# Altium PCB PCB1.PcbDoc
Units mm, origin at the board's own origin, x right, y up, seen from the top; angles counter-clockwise.
Board outline 71.95 x 78.2 mm, 2 copper layers (Top Layer, Bottom Layer); 19 components, 26 nets, 66 pads, 0 vias.
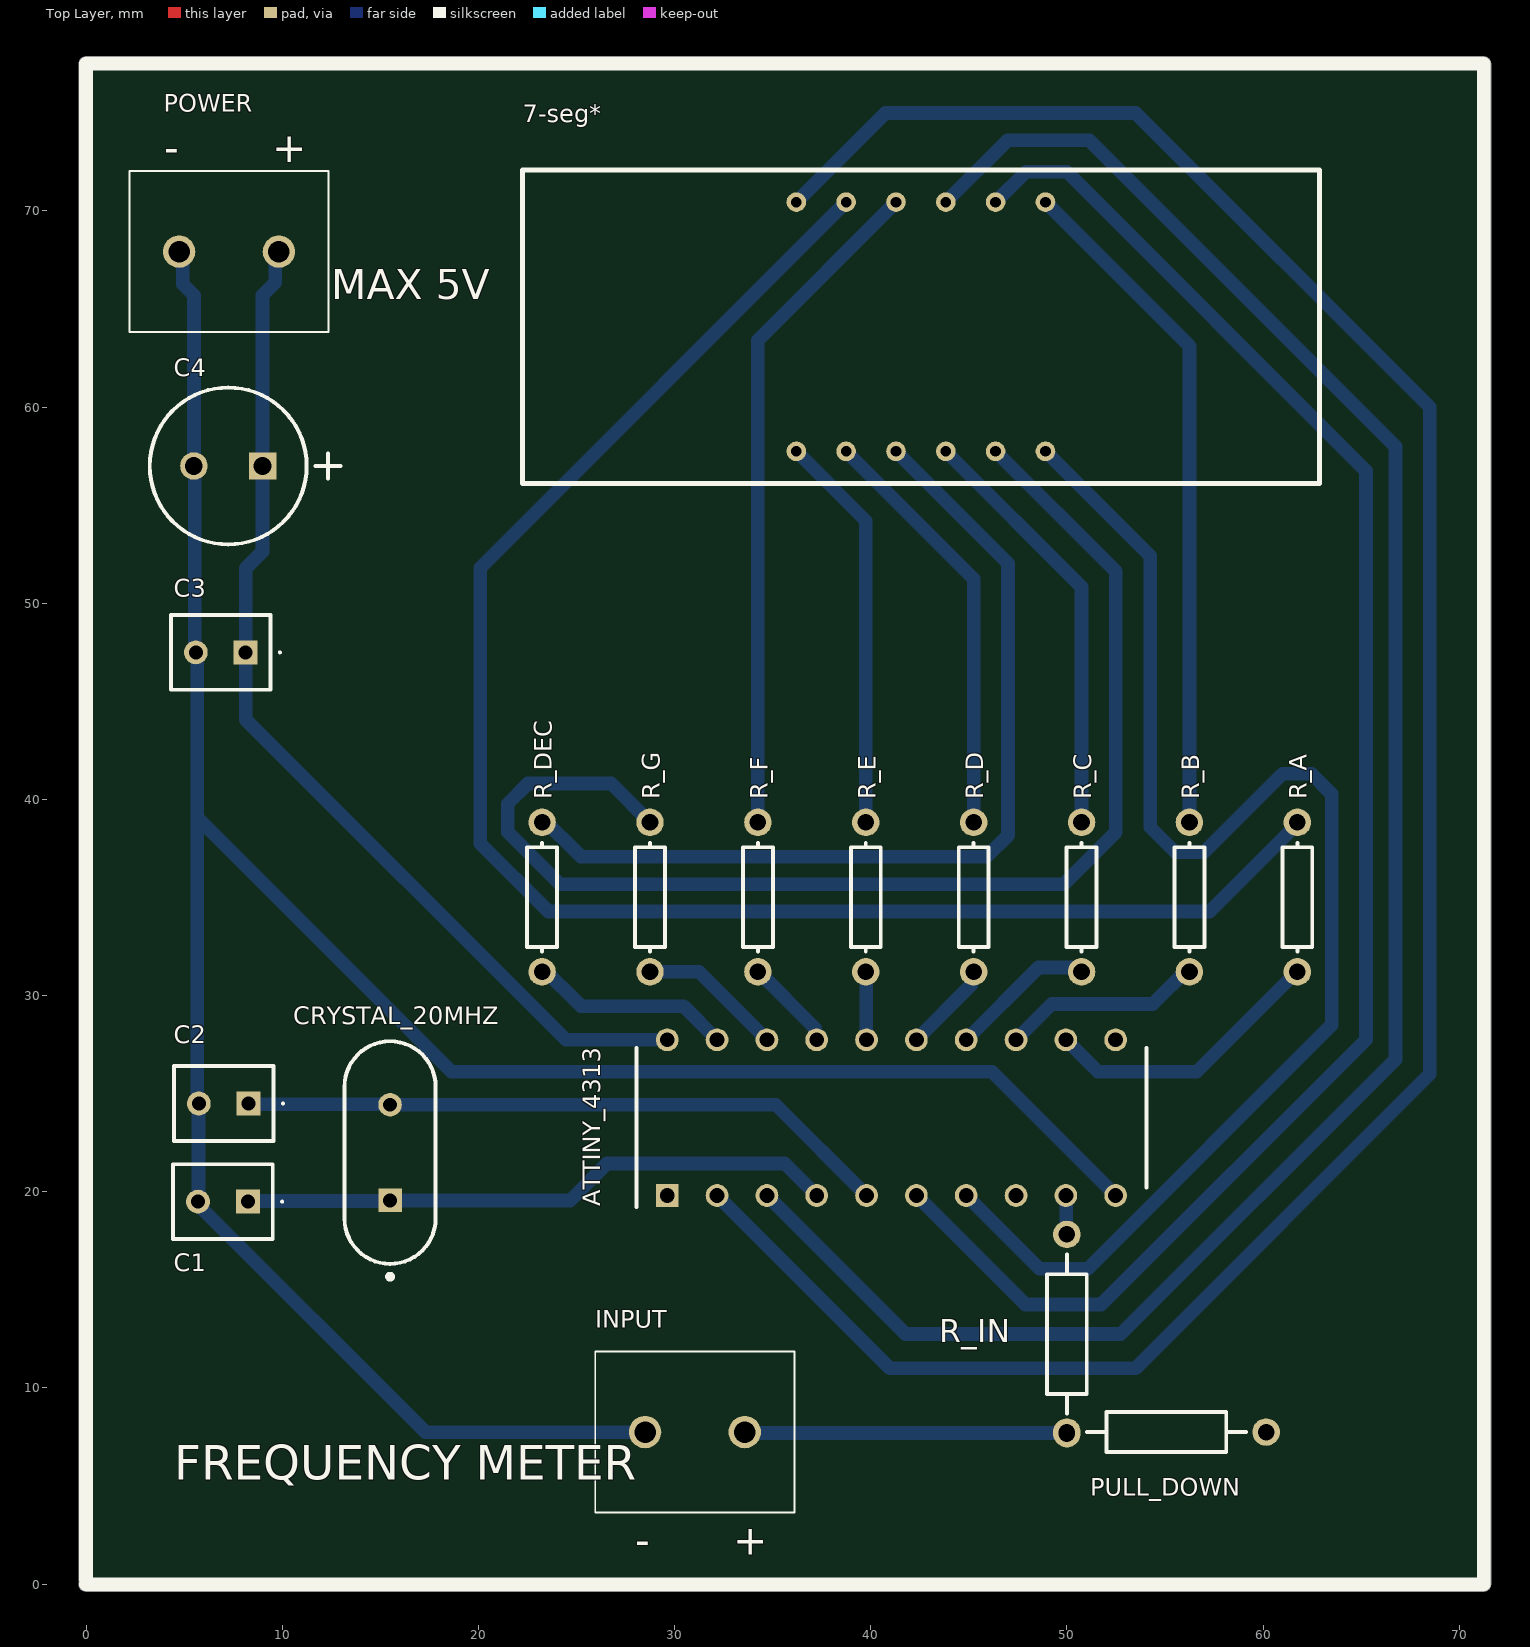
[diagram p0: Top Layer view]
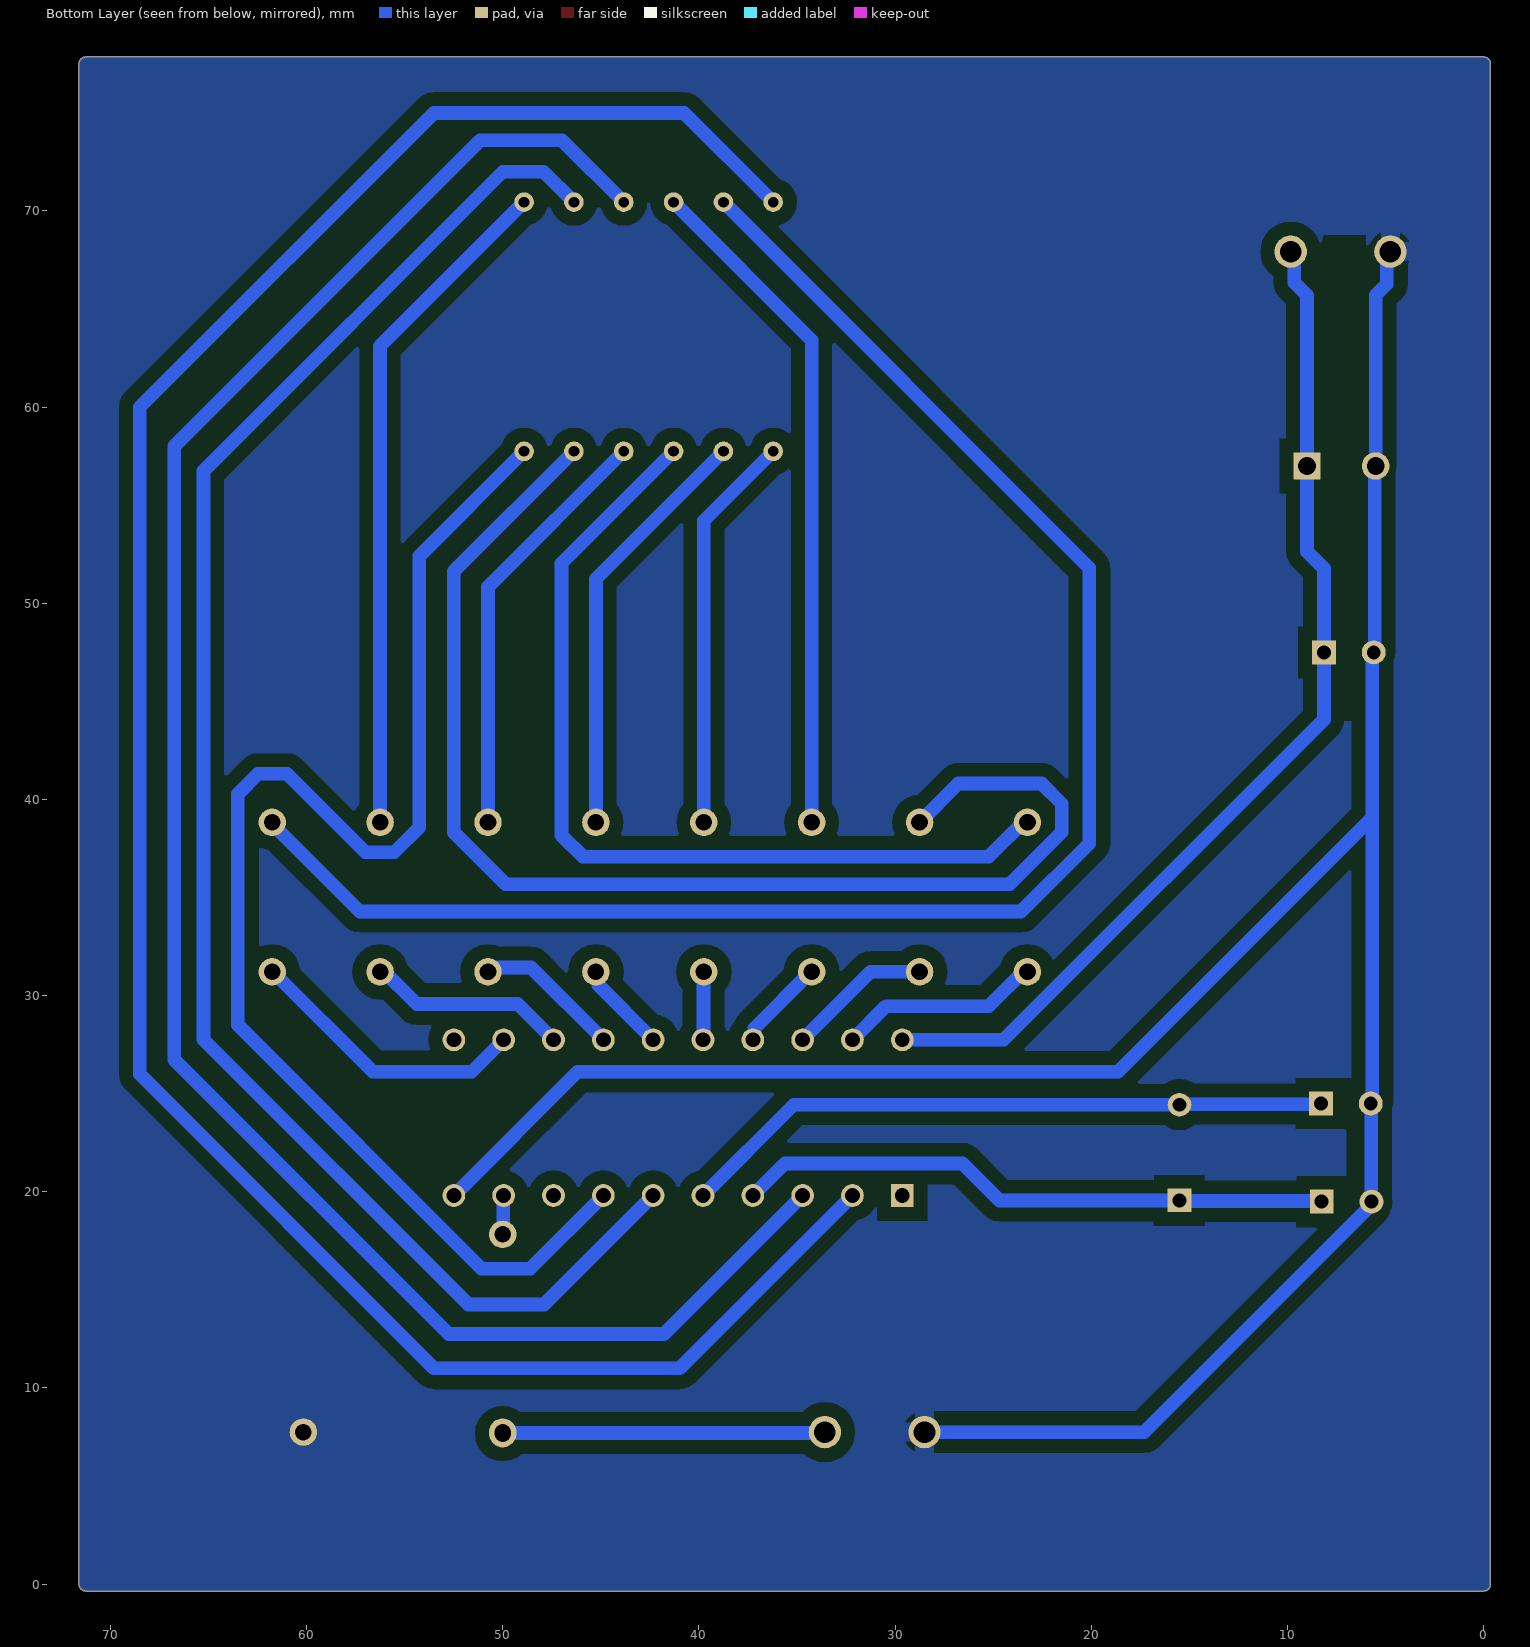
[diagram p1: Bottom Layer view, seen from below]

## Layer stack, top to bottom
Top Solder: solder mask 0.0102, Solder Resist, Dk 3.5
Top Layer: signal copper 0.0356
Dielectric 1: dielectric 0.32, FR-4, Dk 4.8
Bottom Layer: signal copper 0.0356
Bottom Solder: solder mask 0.0102, Solder Resist, Dk 3.5

## Board outline
-0.327,0.125 cw(c0,0.25) -0.35,0.25 -0.35,77.5 cw(c0,77.5) 0,77.85 71.25,77.85 cw(c71.25,77.5) 71.6,77.5 71.6,0 cw(c71.25,0) 71.25,-0.35 0,-0.35 cw(c0,0)

## Design rules (kind name [scope] priority, off if disabled: settings)
Clearance [All] p1: gap=0.7 ignorepadtopadclearanceinfootprint=TRUE
PlaneClearance [All] p1: clearance=1
PlaneConnect [All] p1: planeconnectstyle=Relief reliefexpansion=0.508 reliefentries=4 reliefconductorwidth=1 reliefairgap=0.254
PolygonConnect [All] p1: thpad.connectstyle=Relief thpad.reliefconductorwidth=1 thpad.reliefentries=4 thpad.polygonreliefangle="90 Angle" thpad.airgapwidth=0.254 smdpad.connectstyle=Relief smdpad.reliefconductorwidth=0.254 smdpad.reliefentries=4 smdpad.polygonreliefangle="90 Angle" smdpad.airgapwidth=0.254 via.connectstyle=Relief via.reliefconductorwidth=0.254 via.reliefentries=4 via.polygonreliefangle="90 Angle" via.airgapwidth=0.254
RoutingLayers [All] p1: top layer_v5=FALSE bottom layer_v5=TRUE
RoutingVias [All] p1: holewidth=0.711 width=1.27 viastyle="Through Hole" minholewidth=0.711 minwidth=1.27 maxholewidth=0.711 maxwidth=1.27
SolderMaskExpansion [All] p1: expansion=0.102 istentingtop=FALSE
Width [All] p1: maxlimit=1 minlimit=0.7 preferedwidth=0.7
27 further rules are at their usual default settings.

## Components (designator, comment, footprint, x,y, rotation, side; value= is the part's Value field where it differs from the comment)
7-seg* "7 segment 4 digit display" PCBComponent_1 42.56,64.1 r0 top
ATTINY_4313 "ATTINY4313-PU" DIP794W56P254L2574H533Q20N 41.06,23.781 r90 top
C1 "12pf" C320C104KCR5TA 8.25,19.5 r180 top
C2 "22pf" C320C104KCR5TA 8.29,24.5 r180 top
C3 "C320C104KCR5TA" C320C104KCR5TA 8.137,47.5 r180 top
C4 "ECA1HM101" CAPPR65-350-1150X800X1250 7.25,57 r180 top value=470µF
CRYSTAL_20MHZ "FOXSLF/080-20" FOX-FOXSLF080-20 15.5,22 r90 top
INPUT "282837-2" 2828372 33.58,7.75 r180 top
POWER "282837-2" 2828372 9.83,67.927 r180 top
PULL_DOWN "100k" AXIAL-0.4 55.08,7.75 r0 top value=1K
R_A "Res1" AXIAL-0.3 61.75,35.025 r270 top value=560
R_B "Res1" AXIAL-0.3 56.25,35.025 r270 top value=560
R_C "Res1" AXIAL-0.3 50.75,35.025 r270 top value=560
R_D "Res1" AXIAL-0.3 45.25,35.025 r270 top value=560
R_DEC "Res1" AXIAL-0.3 23.25,35.025 r270 top value=560
R_E "Res1" AXIAL-0.3 39.75,35.025 r270 top value=560
R_F "Res1" AXIAL-0.3 34.25,35.025 r270 top value=560
R_G "Res1" AXIAL-0.3 28.75,35.025 r270 top value=560
R_IN "270" AXIAL-0.4 50,12.75 r270 top value=1K

## Footprints (in the part's own frame and the unit in brackets; to place one, negate y for a bottom-side part, rotate by r counter-clockwise, add the part's x,y. Pads: shape width x height; smd on the part's side, far side on the other; paste and mask are expansions set on the pad)
2828372 [mm]
  round 1.65 hole 1.1: 1(0,0) 2(5.08,0)
  silkscreen extent -2.54,-4.1 7.62,4.1, body extent -2.51,-4.11 8.25,4.09, height 9.84
AXIAL-0.3 [mm] "Axial Device, Thru-Hole; 2 Leads; 0.3 in Pin Spacing"
  round 1.4 hole 0.85: 1(-3.81,0) 2(3.81,0)
  silkscreen extent -2.77,-0.76 2.77,0.76
AXIAL-0.4 [mm] "Axial Device, Thru-Hole; 2 Leads; 0.4 in Pin Spacing"
  round 1.4 hole 0.85: 1(-5.08,0) 2(5.08,0)
  silkscreen extent -4.06,-1.02 4.06,1.02
C320C104KCR5TA [mm]
  rect 1.217x1.217 hole 0.71: 1(0,0)
  round 1.217 hole 0.71: 2(2.54,0)
  silkscreen extent -1.8,-1.9 3.81,1.91, body extent -1.27,-1.91 3.81,1.91, height 7.36
CAPPR65-350-1150X800X1250 [mm] "THD, 2-Leads, Dia 8mm, Pin Spacing 3.5mm"
  rect 1.4x1.4 hole 0.9: 1(-1.75,0)
  round 1.4 hole 0.9: 2(1.75,0)
  silkscreen extent -5.71,-4 4,4, body extent -4,-4 3.95,4, height 12.5
DIP794W56P254L2574H533Q20N [mm]
  rect 1.159x1.159 hole 0.759: 1(-3.969,11.43)
  round 1.159 hole 0.759: 2(-3.969,8.89) 3(-3.969,6.35) 4(-3.969,3.81) 5(-3.969,1.27) 6(-3.969,-1.27) 7(-3.969,-3.81) 8(-3.969,-6.35) 9(-3.969,-8.89) 10(-3.969,-11.43) 11(3.969,-11.43) 12(3.969,-8.89) 13(3.969,-6.35) 14(3.969,-3.81) 15(3.969,-1.27) 16(3.969,1.27) 17(3.969,3.81) 18(3.969,6.35) 19(3.969,8.89) 20(3.969,11.43)
  silkscreen extent -4.55,-12.99 3.56,12.99, body extent -4.11,-12.87 4.11,12.87, height 5.33
FOX-FOXSLF080-20 [mm] "THD, 2-Leads, Body 11.35x4.65mm"
  rect 1.2x1.2 hole 0.7: 1(-2.44,0)
  round 1.2 hole 0.7: 2(2.44,0)
  silkscreen extent -6.45,-2.32 5.67,2.32, body extent -5.68,-2.33 5.68,2.33, height 3.6
PCBComponent_1 [mm]
  round 1 hole 0.55: 1(-6.35,-6.35) 2(-3.81,-6.35) 3(-1.27,-6.35) 4(1.27,-6.35) 5(3.81,-6.35) 6(6.35,-6.35) 7(6.35,6.35) 8(3.81,6.35) 9(1.27,6.35) 10(-1.27,6.35) 11(-3.81,6.35) 12(-6.35,6.35)
  silkscreen extent -20.32,-8 20.32,8, body extent -20.25,-7.9 20.25,7.9, height 8

## Part data
ATTINY_4313: "Integrated Circuit", Manufacturer_Name=Microchip, Mouser Part Number=556-ATTINY4313-PU, Arrow Part Number=ATTINY4313-PU, Arrow Price/Stock=https://www.arrow.com/en/products/attiny4313-pu/microchip-technology?region=nac, Datasheet Link=http://www.atmel.com/images/8246s.pdf, Height=5.334mm, Manufacturer_Part_Number=ATTINY4313-PU, Mouser Price/Stock=https://www.mouser.co.uk/ProductDetail/Microchip-Technology/ATTINY4313-PU?qs=lwdSMh1%2FoYKRSyWx6oCIeQ%3D%3D
C1 C2: library part C320C104KCR5TA, "Capacitor", Manufacturer_Name=KEMET, Mouser Part Number=80-C320C104KCR, Arrow Part Number=C320C104KCR5TA, Arrow Price/Stock=https://www.arrow.com/en/products/c320c104kcr5ta/kemet-corporation, Datasheet Link=https://content.kemet.com/datasheets/KEM_C1055_HIVOLT_GOLDMAX_300_X7R.pdf, Height=7.36mm, Manufacturer_Part_Number=C320C104KCR5TA, Mouser Price/Stock=https://www.mouser.com/Search/Refine.aspx?Keyword=80-C320C104KCR
C3: "Capacitor", Manufacturer_Name=KEMET, Mouser Part Number=80-C320C104KCR, Arrow Part Number=C320C104KCR5TA, Arrow Price/Stock=https://www.arrow.com/en/products/c320c104kcr5ta/kemet-corporation, Datasheet Link=https://content.kemet.com/datasheets/KEM_C1055_HIVOLT_GOLDMAX_300_X7R.pdf, Height=7.36mm, Manufacturer_Part_Number=C320C104KCR5TA, Mouser Price/Stock=https://www.mouser.com/Search/Refine.aspx?Keyword=80-C320C104KCR
C4: library part CMP-001-00026-7, "Aluminum Electrolytic Capacitor, 100 uF, +/- 20%, 50 V, -40 to 85 degC, 2-Pin THD, RoHS, Bulk", Capacitor Type=Electrolytic, Case/Package=Radial, Manufacturer=Panasonic, Max Operating Temperature=85°C, Min Operating Temperature=-40°C, Package Description="2-Pin Radial Lead, Dia 8 mm, Height 12.5 mm", Package Quantity=200, Package Reference=CAPPR65-350-1150X800X1250, Ripple Current=250mA, Tolerance=20%, Voltage Rating=50V, Datasheet URL=https://industrial.panasonic.com/cdbs/www-data/pdf/RDF0000/ABA0000C1218.pdf, Datasheet Version="Rev. 05, 10/2016", Diameter=8mm, Lead Pitch=3.5mm, Manufacturer URL=http://www.panasonic.com/, Mounting Technology=TH, Packaging=Bulk, Pins=2, Ripple Current (AC)=250mA, RoHS Compliant=True
CRYSTAL_20MHZ: library part CMP-003-00025-2, "Resistance Weld Thru-Hole Crystal, 8 MHz, +/- 50 ppm, 10 pF, -20 to 70 degC, 2-Pin THD, RoHS, Bulk", Case/Package=FOXSLF080-20, Frequency=8MHz, Frequency Tolerance=30ppm, Load Capacitance=20pF, Manufacturer="FOX Electronics", Max Operating Temperature=70°C, Min Operating Temperature=-20°C, Package Description="2-Pin Through Hole Device, Body 11.35 x 4.65 mm", Package Quantity=100, Resistance=80Ohm, Tolerance=50ppm, Datasheet URL=http://download.siliconexpert.com/pdfs/2015/4/5/6/5/7/200/fox_/manual/35607121449963728hc49slf.pdf, Datasheet Version=Mar-15, ESR=80, Manufacturer URL=http://www.foxonline.com/, Mounting Technology=TH, Package Reference=FOXSLF080-20, Packaging=Bulk, Pins=2, RoHS Compliant=True
INPUT POWER: "Connector", Manufacturer_Name="TE Connectivity", Mouser Part Number=571-2828372, Arrow Part Number=282837-2, Arrow Price/Stock=https://www.arrow.com/en/products/282837-2/te-connectivity?region=europe, Datasheet Link=https://www.te.com/commerce/DocumentDelivery/DDEController?Action=srchrtrv&DocNm=282837&DocType=Customer+Drawing&DocLang=English&DocFormat=pdf&PartCntxt=282837-2, Height=10.3mm, Manufacturer_Part_Number=282837-2, Mouser Price/Stock=https://www.mouser.co.uk/ProductDetail/TE-Connectivity/282837-2?qs=A%252Bip%252BNCYi6O2H0NGWOeAxg%3D%3D
PULL_DOWN R_IN: library part Res2, "Resistor", LatestRevisionDate=17-Jul-2002, LatestRevisionNote="Re-released for DXP Platform.", PackageDescription="Axial Device, Thru-Hole; 2 Leads; 0.4 in Pin Spacing", PackageReference=AXIAL-0.4, Published=8-Jun-2000, Publisher="Altium Limited"
R_A R_B R_C R_D R_DEC R_E R_F R_G: "Resistor", LatestRevisionDate=17-Jul-2002, LatestRevisionNote="Re-released for DXP Platform.", PackageDescription="Axial Device, Thru-Hole; 2 Leads; 0.3 in Pin Spacing", PackageReference=AXIAL-0.3, Published=8-Jun-2000, Publisher="Altium Limited"

## Nets (pads, with @x,y where several pads share a name; then routed paths per layer and width w, separated by ;. In a path a pad name is that pad's centre, name@x,y a point inside that pad or via, vN(x,y) a via of type N, cw(c..) or ccw(c..) an arc to the next point about the centre after c; other vN are vias at no path point)
A: ATTINY_4313.12 R_A.2 | length 14.8
  Bottom Layer w0.7: ATTINY_4313.12 51.58,26.12 56.62,26.12 R_A.2@61.874,31.374
B: ATTINY_4313.13 R_B.2 | length 10.4
  Bottom Layer w0.7: ATTINY_4313.13 49.232,29.572 54.382,29.572 R_B.2@56.25,31.44
C: ATTINY_4313.14 R_C.2 | length 7.4
  Bottom Layer w0.7: ATTINY_4313.14 48.56,31.44 R_C.2@50.75,31.44
D: ATTINY_4313.15 R_D.2 | length 4.7
  Bottom Layer w0.7: ATTINY_4313.15 45.116,30.536 45.116,31.141 R_D.2@45.25,31.275
D1: 7-seg*.12 ATTINY_4313.2 | length 120.6
  Bottom Layer w0.7: ATTINY_4313.2 40.982,11 53.5,11 68.5,26 68.5,60 53.5,75 40.76,75 7-seg*.12
D2: 7-seg*.9 ATTINY_4313.3 | length 102.7
  Bottom Layer w0.7: ATTINY_4313.3 41.772,12.75 52.75,12.75 66.75,26.75 66.75,58 51.15,73.6 46.98,73.6 7-seg*.9
D3: 7-seg*.8 ATTINY_4313.6 | length 85.7
  Bottom Layer w0.7: ATTINY_4313.6 47.892,14.25 51.75,14.25 65.25,27.75 65.25,56.75 50,72 47.92,72 7-seg*.8
D4: 7-seg*.6 ATTINY_4313.7 | length 70.3
  Bottom Layer w0.7: ATTINY_4313.7 48.602,16.08 51.08,16.08 63.5,28.5 63.5,40.285 62.475,41.31 61,41.31 57,37.31 55.525,37.31 54.25,38.585 54.25,52.41 7-seg*.6
DEC: ATTINY_4313.19 R_DEC.2 | length 10.4
  Bottom Layer w0.7: R_DEC.2@23.25,31.44 25.225,29.465 30.455,29.465 ATTINY_4313.19
E: ATTINY_4313.16 R_E.2 | length 3.5
  Bottom Layer w0.7: R_E.2@39.75,31.25 39.77,31.23 39.77,27.77 ATTINY_4313.16
F: ATTINY_4313.17 R_F.2 | length 4.7
  Bottom Layer w0.7: R_F.2@34.25,31.25 37.162,28.338 37.162,27.838 ATTINY_4313.17
G: ATTINY_4313.18 R_G.2 | length 7.4
  Bottom Layer w0.7: R_G.2 31.245,31.215 ATTINY_4313.18
GND: ATTINY_4313.10 C1.2 C2.2 C3.2 C4.2 INPUT.2 POWER.2 PULL_DOWN.2 | length 131.5
  Bottom Layer w0.7: POWER.2 4.932,67.745 4.932,66.27 5.5,65.702 C4.2 5.549,56.951 C3.2@5.549,47.549 ; C3.2 C3.2@5.549,47.549 ; INPUT.2 17.298,7.75 5.809,19.239 5.809,19.401 C1.2 5.73,19.52 5.73,24.48 C2.2 5.674,24.576 5.674,39.076 ; ATTINY_4313.10 46.181,26.12 18.63,26.12 5.674,39.076 ; C3.2@5.549,47.549 5.674,47.424 5.674,39.076
IN: ATTINY_4313.9 R_IN.1 | length 2
  Bottom Layer w0.7: ATTINY_4313.9 49.975,19.787 49.975,17.855 R_IN.1
Net7-seg*_1: 7-seg*.1 R_E.1 | length 20.3
  Bottom Layer w0.7: 7-seg*.1 39.75,54.21 R_E.1@39.75,38.87
Net7-seg*_2: 7-seg*.2 R_D.1 | length 21.5
  Bottom Layer w0.7: 7-seg*.2 45.25,51.25 R_D.1@45.25,38.895
Net7-seg*_3: 7-seg*.3 R_DEC.1 | length 47
  Bottom Layer w0.7: R_DEC.1@23.25,39.06 25.225,37.085 45.915,37.085 47,38.17 47,52.04 7-seg*.3
Net7-seg*_4: 7-seg*.4 R_C.1 | length 21.6
  Bottom Layer w0.7: 7-seg*.4 50.75,50.83 R_C.1@50.75,39.06
Net7-seg*_5: 7-seg*.5 R_G.1 | length 65.1
  Bottom Layer w0.7: R_G.1 26.775,40.81 22.525,40.81 21.5,39.785 21.5,38.335 24.15,35.685 49.85,35.685 52.5,38.335 52.5,51.62 7-seg*.5
Net7-seg*_7: 7-seg*.7 R_B.1 | length 34.4
  Bottom Layer w0.7: 7-seg*.7 56.25,63.11 R_B.1@56.25,39.06
Net7-seg*_10: 7-seg*.10 R_F.1 | length 34.5
  Bottom Layer w0.7: R_F.1@34.25,38.87 34.25,63.41 7-seg*.10
Net7-seg*_11: 7-seg*.11 R_A.1 | length 85.5
  Bottom Layer w0.7: 7-seg*.11 20.1,51.8 20.1,37.755 23.57,34.285 57.285,34.285 R_A.1@61.84,38.84
NetINPUT_1: INPUT.1 PULL_DOWN.1 R_IN.2 | length 16.5
  Bottom Layer w0.7: INPUT.1 33.62,7.71 49.96,7.71 R_IN.2
PA0: ATTINY_4313.5 C2.1 CRYSTAL_20MHZ.2 | length 33.4
  Bottom Layer w0.7: C2.1 8.32,24.47 15.47,24.47 CRYSTAL_20MHZ.2 35.162,24.44 ATTINY_4313.5
PA1: ATTINY_4313.4 C1.1 CRYSTAL_20MHZ.1 | length 30.5
  Bottom Layer w0.7: C1.1 8.28,19.53 15.47,19.53 CRYSTAL_20MHZ.1 24.682,19.56 26.564,21.441 35.62,21.441 ATTINY_4313.4
VCC: ATTINY_4313.20 C3.1 C4.1 POWER.1 | length 52.8
  Bottom Layer w0.7: POWER.1 9.648,67.745 9.648,66.35 9,65.702 C4.1 9,52.636 8.138,51.773 C3.1 8.138,44.078 24.465,27.75 ATTINY_4313.20
pads on no net: ATTINY_4313.1 ATTINY_4313.8 ATTINY_4313.11

## Polygon pours and split planes (outlines as drawn)
GND on Bottom Layer "GND_L02_P000" (solid, pour order 0): -0.327,0.125 cw(c0,0.25) -0.35,0.25 -0.35,77.5 cw(c0,77.5) 0,77.85 71.25,77.85 cw(c71.25,77.5) 71.6,77.5 71.6,0 cw(c71.25,0) 71.25,-0.35 0,-0.35 cw(c0,0)

## Other copper
Bottom Layer:
  pour cut-out: 6.5,46.25 7.5,46.25 7.5,44 6.5,44
  pour cut-out: 6.981,25.809 6.558,25.809 6.5,25.75 6.5,19.5 7,19.5 7,22.25
  pour cut-out: 7.25,47.25 6.25,47.25 6,47.5 6,68.75 8.15,68.75 8.6,67.012 7.941,53.074

## Silkscreen, mask and mechanical layers (free items; w line width, h text height)
Top Overlay:
  lines w0.7: 0,0 71.25,0 71.25,77.5 0,77.5 0,0.25
  text "-" at 4,72.488 h1.52
  text "+" at 9.5,72.496 h1.52
  text "MAX 5V" at 12.492,65.5 h1.52
  text "FREQUENCY METER" at 4.5,4.727 h3
  text "-" at 28,1.488 h1.52
  text "+" at 33,1.496 h1.52